# Altium PCB Copy of PCB1.PcbDoc
Units mm, origin at the board's own origin, x right, y up, seen from the top; angles counter-clockwise.
Board outline 56.87 x 26.01 mm, 2 copper layers (Top Layer, Bottom Layer); 39 components, 32 nets, 129 pads, 0 vias.
Unrouted connection lines stored in the file: 76.
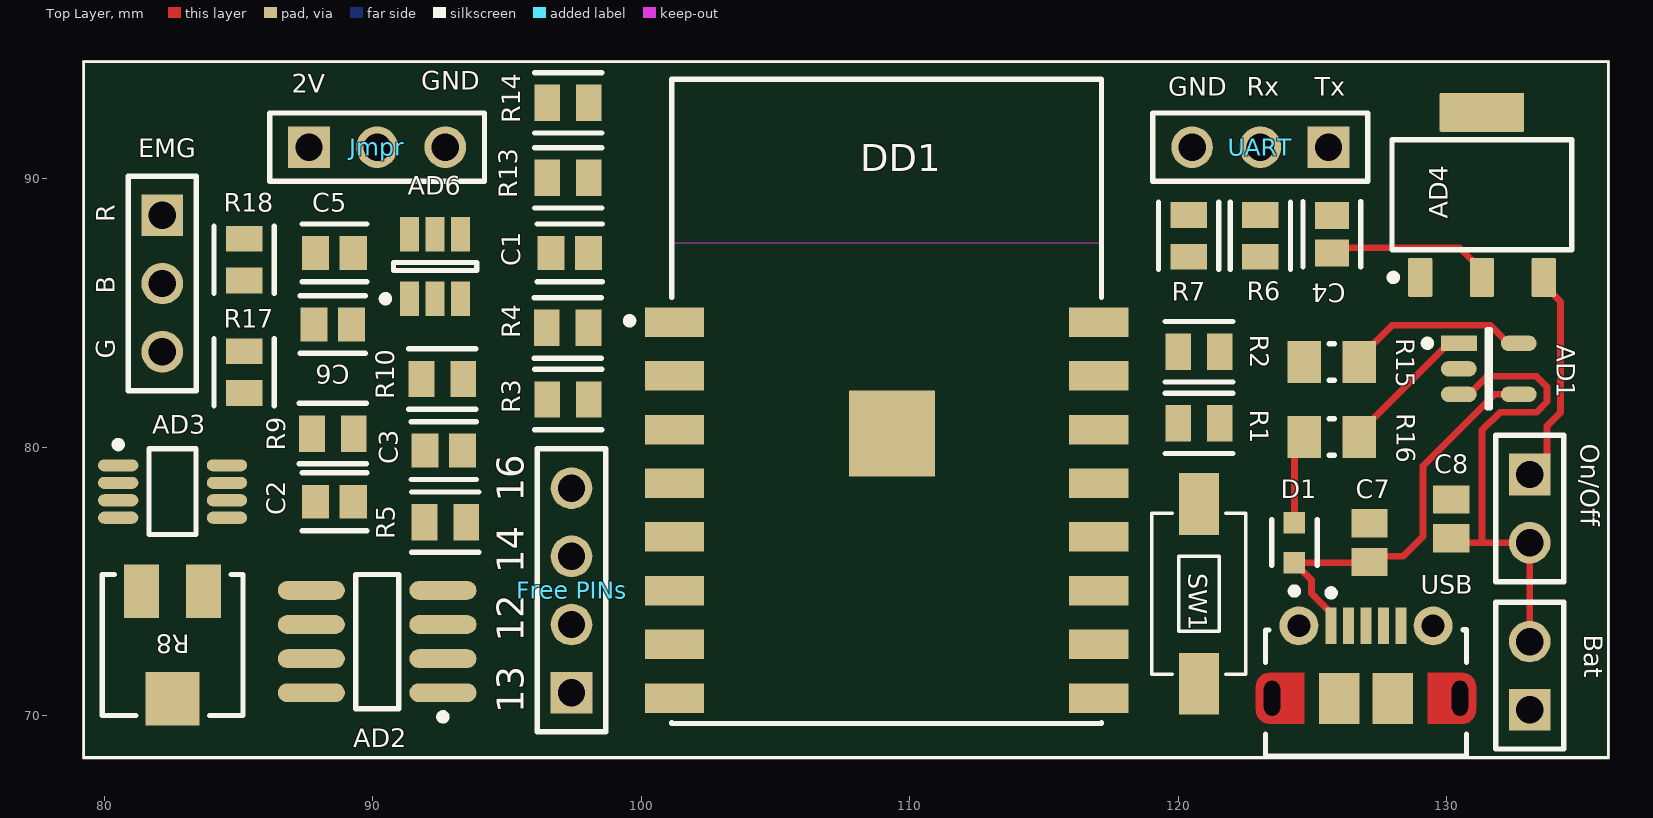
[diagram p0: Top Layer view]
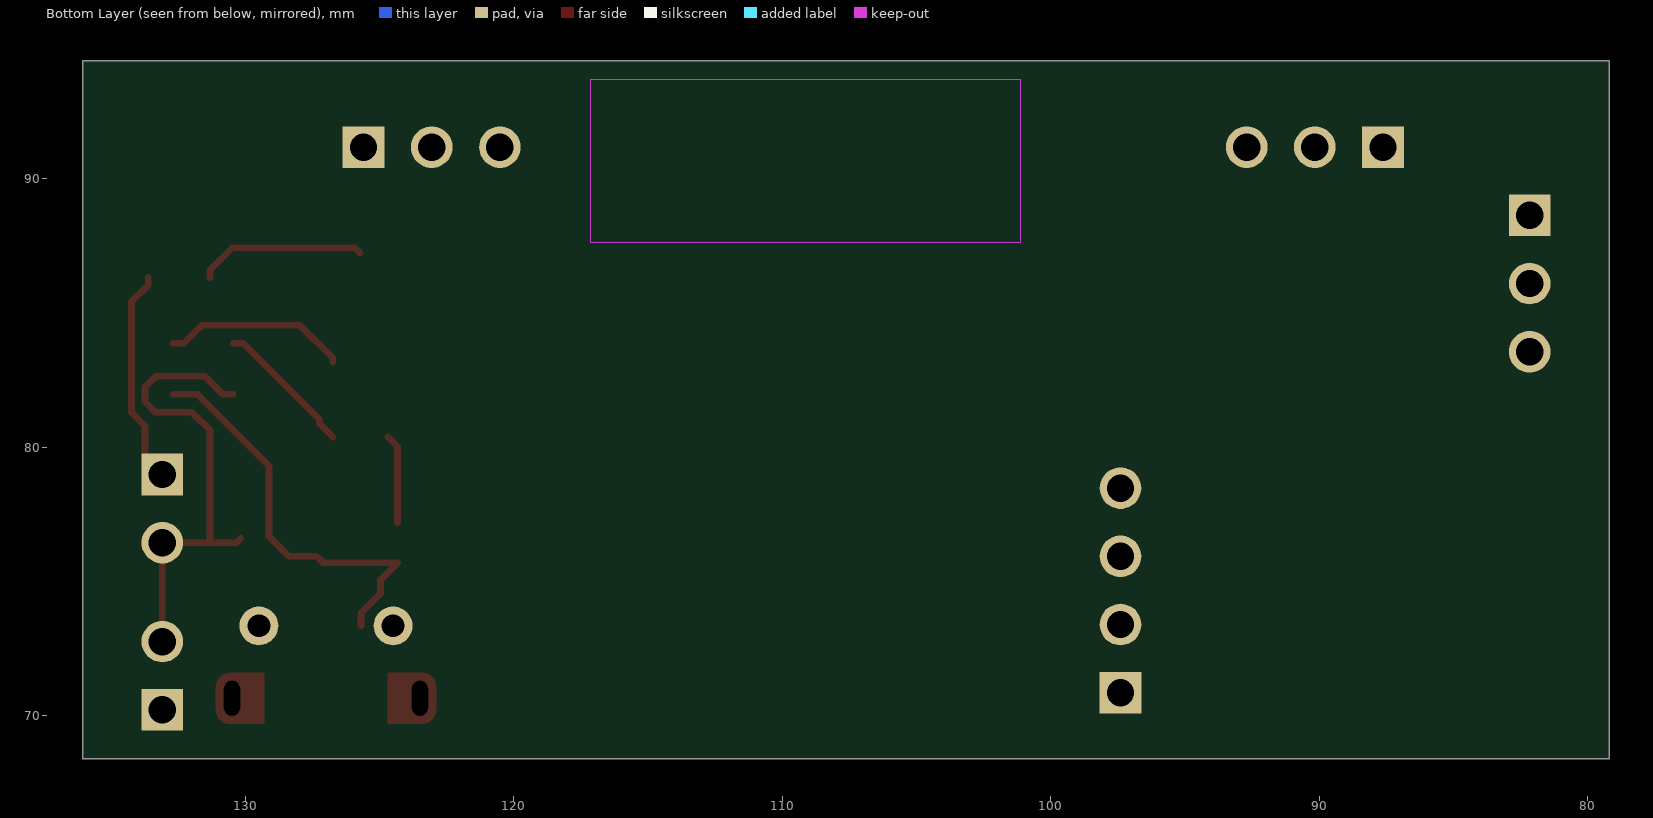
[diagram p1: Bottom Layer view, seen from below]

## Layer stack, top to bottom
Top Solder: solder mask 0.0102, Solder Resist, Dk 3.5
Top Layer: signal copper 0.0356
Dielectric 1: dielectric 0.32, FR-4, Dk 4.8
Bottom Layer: signal copper 0.0356
Bottom Solder: solder mask 0.0102, Solder Resist, Dk 3.5

## Board outline
79.198,68.453 ccw(c79.248,68.453) 79.248,68.403 136.017,68.403 ccw(c136.017,68.453) 136.067,68.453 136.067,94.361 ccw(c136.017,94.361) 136.017,94.411 79.249,94.411 ccw(c79.248,94.361) 79.198,94.361

## Design rules (kind name [scope] priority, off if disabled: settings)
Clearance [All] p1: gap=0.254 ignorepadtopadclearanceinfootprint=FALSE except(0: Arc-Hole Track-Hole SMDPad-Hole THPad-Hole Via-Hole Fill-Hole Poly-Hole Region-Hole Text-Hole)
PolygonConnect [All] p1: connectstyle=Relief reliefconductorwidth=0.254 reliefentries=4 polygonreliefangle="90 Angle" airgapwidth=0.254
RoutingVias [All] p1: holewidth=0.711 width=1.27 viastyle="Through Hole" minholewidth=0.711 minwidth=1.27 maxholewidth=0.711 maxwidth=1.27
SolderMaskExpansion [All] p1: expansion=0.102
Width [All] p1: maxlimit=0.254 minlimit=0.254 preferedwidth=0.254
30 further rules are at their usual default settings.

## Components (designator, comment, footprint, x,y, rotation, side; value= is the part's Value field where it differs from the comment)
AD1 "MCP73831" FP-C04-091-OT-IPC_B 131.572,82.931 r0 top
AD2 "MCP6002" SOIC-SN8_M 90.17,72.771 r180 top
AD3 "AD8226A" ADI-RM-8_L 82.55,78.359 r0 top
AD4 "LM1117" DCY0004A_L 131.318,89.408 r90 top
AD6 "MCP3421" SOT-23-CH6_M 92.329,86.741 r90 top
Bat "TSW-102-26-G-S" SMTC-TSW-102-26-XX-S 133.096,70.231 r90 top
C1 "0.1uf" FP-0805-L_2_0_0_1-W_1_25-IPC_C 97.342,87.249 r0 top
C2 "10uF" FP-0805-L_2_0_0_1-W_1_25-IPC_C 88.579,77.978 r180 top
C3 "10uF" FP-0805-L_2_0_0_1-W_1_25-IPC_C 92.65,79.883 r0 top
C4 "0.1uf" FP-0805-L_2_0_0_1-W_1_25-IPC_C 125.73,87.944 r90 top
C5 "0.1uF" FP-0805-L_2_0_0_1-W_1_25-IPC_C 88.579,87.249 r180 top
C6 "10uF" FP-0805-L_2_0_0_1-W_1_25-IPC_C 88.519,84.582 r180 top
C7 "4.7uF" CAPC2013X145X50LL20T20 127.127,76.454 r270 top
C8 "4.7uF" CAPC2013X145X50LL20T20 130.175,77.343 r270 top
D1 "LTST-C190GKT" FP-LTST-C190GKT-MFG 124.333,76.454 r90 top
DD1 "ESP-12S" FP-ESP-12S-MFG 109.147,81.718 r0 top
EMG "TSW-103-07-T-S" SMTC-TSW-103-07-X-S 82.169,88.646 r270 top
"Free PINs" "TSW-104-08-L-S" SMTC-TSW-104-08-X-S 97.409,70.866 r90 top
Jmpr "TSW-103-07-T-S" SMTC-TSW-103-07-X-S 87.63,91.186 r0 top
On/Off "TSW-102-26-G-S" SMTC-TSW-102-26-XX-S 133.096,78.994 r270 top
R1 "10K" FP-RG2012-IPC_C 120.777,80.899 r180 top
R2 "10K" FP-RG2012-IPC_C 120.777,83.566 r0 top
R3 "10K" FP-RG2012-IPC_C 97.282,81.788 r180 top
R4 "10K" FP-RG2012-IPC_C 97.268,84.455 r180 top
R5 "10K" FP-RG2012-IPC_C 92.71,77.216 r180 top
R6 "1K" FP-RG2012-IPC_C 123.063,87.884 r270 top
R7 "2K" FP-RG2012-IPC_C 120.396,87.884 r270 top
R8 "10K" FP-TS53YJ-MFG 82.55,72.644 r180 top
R9 "1K" FP-RG2012-IPC_C 88.519,80.518 r0 top
R10 "1K" FP-RG2012-IPC_C 92.597,82.55 r180 top
R13 "2K" FP-RG2012-IPC_C 97.282,90.043 r180 top
R14 "2K" FP-RG2012-IPC_C 97.282,92.837 r180 top
R15 "2K" RESC2013X60X30ML20T20 125.721,83.185 r0 top
R16 "470" RESC2013X60X30ML20T20 125.721,80.391 r0 top
R17 "3K" FP-RG2012-IPC_C 85.217,82.804 r270 top
R18 "1K" FP-RG2012-IPC_C 85.217,86.995 r90 top
SW1 "Bootloader mode" 434111050826 120.777,74.549 r90 top
UART "TSW-103-07-T-S" SMTC-TSW-103-07-X-S 125.603,91.186 r180 top
USB "Micro USB" USB-MICRO-B_V 127,72.009 r0 top (schematic designator J1)

## Footprints (in the part's own frame and the unit in brackets; to place one, negate y for a bottom-side part, rotate by r counter-clockwise, add the part's x,y. Pads: shape width x height; smd on the part's side, far side on the other; paste and mask are expansions set on the pad)
434111050826 [mm] "6.0*3.5mm vertical type, SMD, height 5.0mm, white actuator, 260gf, T&R"
  rect 2.3x1.5 smd: 1(-3.35,0) 2(3.35,0)
  silkscreen extent -3,-1.75 3,1.75, body extent -4,-1.75 4,1.75, height 5
ADI-RM-8_L [mm] "SOP, 8-Leads, Body 3x3mm, Pitch 0.65mm, IPC High Density"
  oval 1.5x0.45 smd: 1(-2.025,0.975) 2(-2.025,0.325) 3(-2.025,-0.325) 4(-2.025,-0.975) 5(2.025,-0.975) 6(2.025,-0.325) 7(2.025,0.325) 8(2.025,0.975)
  silkscreen extent -2.15,-1.6 0.87,1.87, body extent -1.6,-1.6 1.6,1.6, height 1.1
CAPC2013X145X50LL20T20 [mm] "Chip Capacitor, 2-Leads, Body 2.00x1.25mm, IPC High Density"
  rect 1.05x1.35 smd: 1(-0.725,0) 2(0.725,0)
  body extent -1.1,-0.72 1.1,0.72, height 1.45
DCY0004A_L [mm] "SOT223, 4-Leads, Body 6.7x3.7mm, Pitch 2.3mm, IPC High Density"
  rrect11% 1.45x0.9 smd: 1(-3.075,2.3) 2(-3.075,0) 3(-3.075,-2.3)
  rrect7% 1.45x3.15 smd: 4(3.075,0)
  silkscreen extent -3.2,-3.35 2.05,3.42, body extent -3.5,-3.25 3.5,3.25, height 1.62
FP-0805-L_2_0_0_1-W_1_25-IPC_C [mm]
  rect 1.008x1.262 smd paste+0 mask+0: 1(-0.702,0) 2(0.702,0)
  silkscreen extent -1.21,-1.07 1.21,1.07, body extent -1.31,-0.77 1.31,0.77, height 0.25
FP-C04-091-OT-IPC_B [mm]
  rect 1.338x0.578 smd paste+0 mask+0: 1(-1.116,0.95)
  rrect100% 1.338x0.578 smd paste+0 mask+0: 2(-1.116,0) 3(-1.116,-0.95) 4(1.116,-0.95) 5(1.116,0.95)
  silkscreen extent -2.41,-1.45 0.05,1.45
FP-ESP-12S-MFG [mm]
  rect 2.2x1.1 smd paste+0 mask+0: 1(-7.9,2.95) 2(-7.9,0.95) 3(-7.9,-1.05) 4(-7.9,-3.05) 5(-7.9,-5.05) 6(-7.9,-7.05) 7(-7.9,-9.05) 8(-7.9,-11.05) 9(7.9,-11.05) 10(7.9,-9.05) 11(7.9,-7.05) 12(7.9,-5.05) 13(7.9,-3.05) 14(7.9,-1.05) 15(7.9,0.95) 16(7.9,2.95)
  rect 3.2x3.2 smd paste+0 mask+0: 17(0.2,-1.2)
  Keep-Out Layer region: -8,5.9 8,5.9 8,12 -8,12
  Keep-Out Layer region: -8,5.9 8,5.9 8,12 -8,12
  silkscreen extent -9.7,-12 8,12, body extent -9.1,-12.1 9.1,12.1, height 0.25
FP-LTST-C190GKT-MFG [mm]
  rect 0.8x0.8 smd paste+0 mask+0: 1(-0.75,0) 2(0.75,0)
  silkscreen extent -1.92,-0.85 0.85,0.85, body extent -1.25,-0.55 1.25,0.55, height 0.25
FP-RG2012-IPC_C [mm]
  rect 0.955x1.356 smd paste+0 mask+0: 1(-0.776,0) 2(0.776,0)
  silkscreen extent -1.25,-1.12 1.25,1.12, body extent -1.35,-0.82 1.35,0.82, height 0.25
FP-TS53YJ-MFG [mm]
  rect 1.3x2 smd paste+0 mask+0: 1(1.15,-2) 3(-1.15,-2)
  rect 2x2 smd paste+0 mask+0: 2(0,2)
  silkscreen extent -2.63,-2.63 2.63,2.63, body extent -2.73,-3.1 2.73,3.1, height 0.25
RESC2013X60X30ML20T20 [mm] "Chip Resistor, 2-Leads, Body 2.00x1.25mm, IPC Low Density"
  rect 1.25x1.55 smd: 1(-1.025,0) 2(1.025,0)
  silkscreen extent -0.1,-0.67 0.1,0.67, body extent -1.1,-0.72 1.1,0.72, height 0.6
SMTC-TSW-102-26-XX-S [mm] ".025 SQ Post Terminal Strip Assembly, 1x2 Pins, Vertical, 2.54mm Pitch, Male"
  rect 1.55x1.55 hole 1.02: 1(0,0)
  round 1.55 hole 1.02: 2(2.54,0)
  silkscreen extent -1.46,-1.27 4,1.27, body extent -1.4,-1.27 3.81,1.27, height 8.38
SMTC-TSW-103-07-X-S [mm] ".025 SQ Post Terminal Strip Assembly, 1x3 Pins, Vertical, 2.54mm Pitch, Male"
  rect 1.55x1.55 hole 1.02: 1(0,0)
  round 1.55 hole 1.02: 2(2.54,0) 3(5.08,0)
  silkscreen extent -1.46,-1.27 6.54,1.27, body extent -1.27,-1.27 6.35,1.27, height 8.38
SMTC-TSW-104-08-X-S [mm] ".025 SQ Post Terminal Strip Assembly, 1x4 Pins, Vertical, 2.54mm Pitch, Male"
  rect 1.55x1.55 hole 1.02: 1(0,0)
  round 1.55 hole 1.02: 2(2.54,0) 3(5.08,0) 4(7.62,0)
  silkscreen extent -1.46,-1.27 9.08,1.27, body extent -1.27,-1.27 8.89,1.27, height 8.38
SOIC-SN8_M [mm] "SOIC, 8-Leads, Body 4.9x3.9mm, Pitch 1.27mm, IPC Low Density"
  oval 2.5x0.7 smd: 1(-2.45,1.905) 2(-2.45,0.635) 3(-2.45,-0.635) 4(-2.45,-1.905) 5(2.45,-1.905) 6(2.45,-0.635) 7(2.45,0.635) 8(2.45,1.905)
  silkscreen extent -2.58,-2.5 0.8,2.93, body extent -2,-2.5 2,2.5, height 1.75
SOT-23-CH6_M [mm] "SOT23, 6-Leads, Body 2.9x1.7mm, Pitch 0.95mm, Lead Span 2.8mm, IPC Low Density"
  rect 1.3x0.7 smd: 1(-1.2,0.95) 2(-1.2,0) 3(-1.2,-0.95) 4(1.2,-0.95) 5(1.2,0) 6(1.2,0.95)
  silkscreen extent -1.32,-1.55 0.15,1.97, body extent -0.9,-1.55 0.9,1.55, height 1.45
USB-MICRO-B_V [mm] "USB, MICRO B, Body 7.491x4.695 mm, Pitch 0.65 mm"
  rect 0.4x1.35 smd: 1(-1.3,1.35) 2(-0.65,1.35) 3(0,1.35) 4(0.65,1.35) 5(1.3,1.35)
  round 1.45 hole 0.85: 6(-2.5,1.35) 7(2.5,1.35)
  rrect50% 0x0 hole 0.6 slot 1.3 at 90 deg: 8(-3.5,-1.35) 11(3.5,-1.35)
  rect 1.5x1.9 smd: 9(-1,-1.35) 10(1,-1.35)
  Top Layer circle w0.5: c-3.6,-1.8 r0.25
  Top Layer circle w0.5: c-3.6,-0.9 r0.25
  Top Layer circle w0.5: c3.6,-1.8 r0.25
  Top Layer circle w0.5: c3.6,-0.9 r0.25
  Top Layer region: -3.6,-1.8 -3.6,-0.9 -4.1,-0.9 -4.1,-1.8
  Top Layer region: 3.6,-0.9 3.6,-1.8 4.1,-1.8 4.1,-0.9
  Top Layer region: 2.3,-0.4 2.3,-2.3 3.6,-2.3 3.6,-0.4
  Top Layer region: -2.3,-2.3 -2.3,-0.4 -3.6,-0.4 -3.6,-2.3
  silkscreen extent -3.75,-3.5 3.75,2.7, body extent -4.1,-3.9 4.1,1.5, height 2.67

## Part data
AD1: library part CMP-0133-00143-2, "IC CONTROLLR LI-ION 4.2V SOT23-5", Case/Package=SOT-23, Drain to Source Resistance=350mR, Max Charge Current=500mA, Max Input Voltage=6V, Max Operating Temperature=85°C, Max Output Voltage=4.5V, Max Power Dissipation=1.54W, Min Operating Temperature=-40°C, Min Output Voltage=4.168V, Min Supply Voltage=3.75V, Output Voltage=4.2V, Voltage Rating=4.534V, Contact Plating=Tin, Height=0.051inch, Lead Free="Lead Free", Length=0.122inch, Max Supply Voltage=6V, Mount="Surface Mount", Number of Cells=1, Number of Channels=1, Number of Outputs=1, Number of Pins=5, Output Current=500mA, Packaging="Tape and Reel", Radiation Hardening=No, REACH SVHC="No SVHC", Termination=SMD/SMT, Weight=0.00709oz, Width=0.071inch
AD2: library part CMP-0187-00365-3, "None", Case/Package=SOIC, Input Bias Current=1pA, Input Offset Voltage (Vos)=4.5mV, Max Operating Temperature=85°C, Max Supply Voltage=6V, Min Operating Temperature=-40°C, Min Supply Voltage=1.8V, Nominal Supply Current=100uA, Operating Supply Voltage=5.5V, Output Current=23mA, Package Quantity=100, Power Supply Rejection Ratio (PSRR)=86dB, Voltage Gain=112dB, Amplifier Type="GENERAL PURPOSE", Bandwidth=1MHz, Common Mode Rejection Ratio=60dB, Gain Bandwidth Product=1MHz, Height=1.25mm, Input Offset Voltage-Max=4.5mV, Lead Free="Lead Free", Length=4.9mm, Mount="Surface Mount", Number of Amplifiers=2, Number of Channels=2, Number of Circuits=2, Number of Elements=2, Number of Pins=8, Packaging=Rail/Tube, Radiation Hardening=No, REACH SVHC="No SVHC", RoHS Compliant=Yes, Slew Rate=0.6V/µs, Slew Rate-Nom=0.6V/µs, Supply Current=100uA, Technology=CMOS, Unity Gain Bandwidth Product=1MHz, Width=3.9mm
AD3: library part CMP-2000-05748-1, "Wide Supply Range, Rail-to-Rail Output Instrumentation Amplifier, 2.2 to 36 V, -40 to 125 degC, 8-Pin MSOP (RM-8), RoHS, Tube", Current - Input Bias=20nA, Current - Output / Channel=13mA, Current - Supply=350µA, Manufacturer="Analog Devices", Operating Temperature=-40°C~125°C, Package / Case="8-TSSOP,8-MSOP(0.118\",3.00mmWidth)", Package Description="8-Pin Mini Small Outline Package, Body 3 x 3 mm, Pitch 0.65 mm", Package Reference=RM-8, Package Version=10/2009, Standard Package=50, Supplier Device Package=8-MSOP, Voltage - Input Offset=100µV, Voltage - Supply, Single/Dual (±)=2.2V~36V,±1.35V~18V, -3db Bandwidth=1.5MHz, Amplifier Type=Instrumentation, Category=IntegratedCircuits(ICs), Datasheet URL=http://www.analog.com/media/en/technical-documentation/data-sheets/AD8226.pdf, Datasheet Version="Rev. C, 09/2012", Design Resources=PLCandDCSUniversalAnalogInputUsingEither4or6-PinTerminalBlock, EDA / CAD Models=DownloadfromAcceleratedDesigns, Family=Linear-Amplifiers-Instrumentation,OPAmps,BufferAmps, Gain Bandwidth Product=-, Manufacturer URL=http://www.analog.com/, Mfg Application Notes=AutomaticExternalDefibrillator(AED)SolutionsElectromagneticFlowMeterSolutionsMotorControlSolution—ServoControlProgrammableLogicControllers(PLCs)SolutionsElectrocardiogram(ECG)Solutions, Mounting Technology=SurfaceMount, Mounting Type=SurfaceMount, Number of Circuits=1, Online Catalog=Instrumentation, Output Type=Rail-to-Rail, Package URL=http://www.analog.com/static/imported-files/packages/PKG_PDF/MSOP%28RM%29/RM_8.pdf, Packaging=Tube, PCN Design/Specification=PolyimideAlignmentTarget11/Aug/2015, Product Training Modules=CommonPhotodiodeOp-AmpCircuitProblemsandSolutionsIndirectCurrentFeedbackInstrumentationAmplifierApplicationsGuide, Series=-, Slew Rate=0.6V/µs
AD4: library part CMP-0062-01639-4, "800mA Low-Dropout Linear Regulator, 4-pin SOT-223, Pb-Free LM1117", Manufacturer="Texas Instruments", PackageTopMarking=XYTT*N05A, PartNumber=LM1117MPX-3.3/NOPB, PowerWise=N, Code_IPC=SOT223-4, Code_JEDEC=TO-261-AA, ComponentLink1Description="Datasheet URL", ComponentLink1URL=http://www.ti.com/general/docs/lit/getliterature.tsp?genericPartNumber=LM1117-N&fileType=pdf, CompType="LDO IC", High-Reliability=Y, PackageDescription="Molded SOT-223, 6.50 x 3.56 x 1.6mm Body, 4 Lead, 2.3mm Pitch", PackageReference=DCY0004A, PinCount=4, RoHS=Y
AD6: library part CMP-0188-00739-2, "18-Bit Analog-to-Digital Converter with I2C Interface and On-Board Reference, 6-Pin SOT-23, Extended Temperature, Tape and Reel", Code_IPC=SOT26A-6, ComponentLink1Description="Manufacturer URL", ComponentLink1URL=http://www.microchip.com/, ComponentLink2Description=Datasheet, ComponentLink2URL=http://ww1.microchip.com/downloads/en/DeviceDoc/22003e.pdf, ComponentLink3Description="Package Specification", ComponentLink3URL=http://www.microchip.com/stellent/groups/techpub_sg/documents/packagingspec/en012702.pdf, DatasheetVersion="revE, Aug-2009", PackageDescription="6-Lead Plastic Small Outline Transistor (CH) [SOT-23]", PackageReference=SOT-23-CH6, PackageVersion="revBB, Aug-2009", RevisionNote="URLs added."
Bat On/Off: library part CMP-1024-00327-1, "0.025\" SQ Post Header, Through-hole, Vertical, -55 to 125 degC, 2.54 mm Pitch, 2-Pin, Male, RoHS", Manufacturer=Samtec, Temperature Range="-55 to 125 degC", ComponentLink1Description="Manufacturer URL", ComponentLink1URL=http://www.samtec.com, ComponentLink2Description=Datasheet, ComponentLink2URL=http://www.samtec.com/documents/webfiles/pdf/TSW_TH.PDF, ComponentLink3Description="Package Specification", ComponentLink3URL=http://www.samtec.com/documents/webfiles/cpdf/TSW-XXX-XX-XXX-X-XX-XXX-MKT.pdf, DatasheetVersion=F-214, Mounting Technology=Through-hole, Orientation=Vertical, PackageDescription=".025[0.64] SQ. Post Terminal Strip Assembly", PackageReference=TSW-102-26-XX-S, PackageVersion="DM, 8/1988", PartNumber=TSW-102-26-G-S, Pitch="2.54 mm", RoHS=True
C1 C3 C4 C5: library part CMP-14477-004636-2, "0.1uF 0805", Capacitance=100nF, Case/Package=0805, Case Code (Metric)=2012, Max Operating Temperature=125°C, Min Operating Temperature=-55°C, Package Quantity=3000, Resistor Type=Ceramic, Tolerance=10%, Voltage=10V, Case Code (Imperial)=0805, Construction=Flat, Depth=1.25mm, Halogen Free="Halogen Free", Height=1.25mm, Lead Free="Lead Free", Length=2mm, Mount="Surface Mount", Number of Pins=2, Packaging="Tape and Reel", Radiation Hardening=No, RoHS Compliant=Yes, Series=CFCAP™, Termination=SMD/SMT, Thickness=0.053inch, Voltage Rating=10V, Voltage Rating (DC)=10V, Weight=0.000194oz, Width=1.25mm
C2 C6: library part CMP-14477-004636-2, "10uF 0805", Capacitance=100nF, Case/Package=0805, Case Code (Metric)=2012, Max Operating Temperature=125°C, Min Operating Temperature=-55°C, Package Quantity=3000, Resistor Type=Ceramic, Tolerance=10%, Voltage=10V, Case Code (Imperial)=0805, Construction=Flat, Depth=1.25mm, Halogen Free="Halogen Free", Height=1.25mm, Lead Free="Lead Free", Length=2mm, Mount="Surface Mount", Number of Pins=2, Packaging="Tape and Reel", Radiation Hardening=No, RoHS Compliant=Yes, Series=CFCAP™, Termination=SMD/SMT, Thickness=0.053inch, Voltage Rating=10V, Voltage Rating (DC)=10V, Weight=0.000194oz, Width=1.25mm
C7 C8: library part CMP-2007-01344-1, "4.7uF 0805", Manufacturer=Vitramon, Part Number=VJ0805A472FXJTW1BC
D1: library part CMP-22017-000005-2, "LED GREEN CLEAR CHIP SMD", Case/Package=0603, Case Code (Metric)=1608, Color=Green, Forward Current=30mA, Forward Voltage=2.1V, Lens Color=Colorless, Max Operating Temperature=85°C, Min Operating Temperature=-55°C, Package Quantity=1, Power Dissipation=100mW, Reverse Voltage=5V, Test Current=10mA, Voltage=2V, Case Code (Imperial)=0603, Depth=0.8mm, Dominant Wavelength=569nm, Height=0.8mm, Illumination Color=Green, Lead Free="Lead Free", Length=1.6mm, Lens Style=Clear, Lens Transparency=Clear, Luminous Intensity=6mcd, Mount="Surface Mount", Number of Elements=1, Number of LEDs=1, Number of Pins=2, Packaging="Tape and Reel", Power Rating=100mW, Radiation Hardening=No, Viewing Angle=130°, Wavelength=565nm, Width=0.8mm
DD1: library part CMP-204316-000002-1, "RX TXRX MOD WIFI PCB TRACE SMD", Frequency=2.484GHz, Data Rate=54Mbps, Interface=I2C, Sensitivity=-90dBm, Series=-
EMG Jmpr UART: library part CMP-1024-00332-1, "0.025\" SQ Post Header, Through-hole, Vertical, -55 to 105 degC, 2.54 mm Pitch, 3-Pin, Male, RoHS", Manufacturer=Samtec, Temperature Range="-55 to 105 degC", ComponentLink1Description="Manufacturer URL", ComponentLink1URL=http://www.samtec.com, ComponentLink2Description=Datasheet, ComponentLink2URL=http://www.samtec.com/documents/webfiles/pdf/TSW_TH.PDF, ComponentLink3Description="Package Specification", ComponentLink3URL=http://www.samtec.com/documents/webfiles/cpdf/TSW-XXX-XX-XXX-X-XX-XXX-MKT.pdf, DatasheetVersion=F-214, Mounting Technology=Through-hole, Orientation=Vertical, PackageDescription=".025[0.64] SQ. Post Terminal Strip Assembly", PackageReference=TSW-103-07-X-S, PackageVersion="DM, 8/1988", PartNumber=TSW-103-07-T-S, Pitch="2.54 mm", RoHS=True
"Free PINs": library part CMP-1024-00358-1, "0.025\" SQ Post Header, Through-hole, Vertical, -55 to 125 degC, 2.54 mm Pitch, 4-Pin, Male, RoHS", Manufacturer=Samtec, Temperature Range="-55 to 125 degC", ComponentLink1Description="Manufacturer URL", ComponentLink1URL=http://www.samtec.com, ComponentLink2Description=Datasheet, ComponentLink2URL=http://www.samtec.com/documents/webfiles/pdf/TSW_TH.PDF, ComponentLink3Description="Package Specification", ComponentLink3URL=http://www.samtec.com/documents/webfiles/cpdf/TSW-XXX-XX-XXX-X-XX-XXX-MKT.pdf, DatasheetVersion=F-214, Mounting Technology=Through-hole, Orientation=Vertical, PackageDescription=".025[0.64] SQ. Post Terminal Strip Assembly", PackageReference=TSW-104-08-X-S, PackageVersion="DM, 8/1988", PartNumber=TSW-104-08-L-S, Pitch="2.54 mm", RoHS=True
R1 R2 R3 R4 R5: library part CMP-2001-04803-2, "0805, 10kO", Case/Package=0805, Case Code (Metric)=2012, Max Operating Temperature=155°C, Max Power Dissipation=125mW, Min Operating Temperature=-55°C, Package Quantity=5000, Resistance=10kR, Resistor Type="Thin Film", Temperature Coefficient=10ppm/°C, Tolerance=0.05%, Voltage Rating=150V, Case Code (Imperial)=0805, Features="Automotive AEC-Q200", Height=0.02inch, Lead Free="Lead Free", Length=0.079inch, Number of Terminations=2, Packaging="Tape and Reel", Power Rating=125mW, RoHS Compliant=Yes, Series=RG, Size Code=0805, Termination=SMD/SMT, Voltage Rating (DC)=150V, Weight=0.000194oz, Width=1.2mm
R6 R9 R10 R17 R18: library part CMP-2001-04803-2, "0805, 1kO", Case/Package=0805, Case Code (Metric)=2012, Max Operating Temperature=155°C, Max Power Dissipation=125mW, Min Operating Temperature=-55°C, Package Quantity=5000, Resistance=10kR, Resistor Type="Thin Film", Temperature Coefficient=10ppm/°C, Tolerance=0.05%, Voltage Rating=150V, Case Code (Imperial)=0805, Features="Automotive AEC-Q200", Height=0.02inch, Lead Free="Lead Free", Length=0.079inch, Number of Terminations=2, Packaging="Tape and Reel", Power Rating=125mW, RoHS Compliant=Yes, Series=RG, Size Code=0805, Termination=SMD/SMT, Voltage Rating (DC)=150V, Weight=0.000194oz, Width=1.2mm
R7 R13 R14: library part CMP-2001-04803-2, "0805, 2kO", Case/Package=0805, Case Code (Metric)=2012, Max Operating Temperature=155°C, Max Power Dissipation=125mW, Min Operating Temperature=-55°C, Package Quantity=5000, Resistance=10kR, Resistor Type="Thin Film", Temperature Coefficient=10ppm/°C, Tolerance=0.05%, Voltage Rating=150V, Case Code (Imperial)=0805, Features="Automotive AEC-Q200", Height=0.02inch, Lead Free="Lead Free", Length=0.079inch, Number of Terminations=2, Packaging="Tape and Reel", Power Rating=125mW, RoHS Compliant=Yes, Series=RG, Size Code=0805, Termination=SMD/SMT, Voltage Rating (DC)=150V, Weight=0.000194oz, Width=1.2mm
R8: library part CMP-02410-000010-1, "0-10K", Max Operating Temperature=125°C, Max Power Dissipation=250mW, Min Operating Temperature=-55°C, Package Quantity=1, Resistance=100kR, Resistance Tolerance=20%, Resistor Type=Cermet, Temperature Coefficient=100ppm/°C, Depth=5.5mm, Height=0.106inch, Lead Free="Lead Free", Length=0.197inch, Military Standard=Not, Mount="Surface Mount", Number of Turns=1, Packaging="Tape and Reel", Power Rating=250mW, Radiation Hardening=No, RoHS Compliant=Yes, Series=TS53Y, Taper=Linear, Technology=CERMET, Termination=SMD/SMT, Tolerance=20%, Width=0.197inch
R15: library part CMP-2001-04656-1, "0805, 2KO", Manufacturer="KOA Speer", Part Number=RK73B2ATTD102J
R16: library part CMP-2001-04656-1, "0805, 470O", Manufacturer="KOA Speer", Part Number=RK73B2ATTD102J
SW1: library part CMP-1459-00003-1, "WS-TASV SMD Tact Switch 6.0X3.5 mm", Manufacturer="Wuerth Elektronik", PartNumber=434111050826, ComponentLink1Description="Manufacturer URL", ComponentLink1URL=http://www.we-online.com, ComponentLink2Description=Datasheet, ComponentLink2URL=http://katalog.we-online.de/em/datasheet/434111050826.pdf, NoPins=02, PackageReference=434111050826
USB: library part CMP-2000-05827-1, "Micro-USB B Receptacle, Right Angle, Bottom Mount, Surface Mount, with Solder Tabs, -30 to 85 degC, 5-Pin USB, RoHS, Tape and Reel", Manufacturer=Molex, Package Description="5-Leads USB, Micro B, Body 7.5 x 5 mm, Pitch 0.65 mm", Package Reference=MICRO-B, Package Version="Rev. F, 12/2012", Standard Package=1, Voltage - Max=30V, 3D Model=105017-0001.stp, Catalog Drawings=1050170001, Category=Connectors,Interconnects, Circuits=5, Connector Type=USB-microB, Datasheet URL=http://www.molex.com/elqNow/elqRedir.htm?ref=http://www.molex.com/webdocs/datasheets/pdf/en-us/1050170001_IO_CONNECTORS.pdf, Datasheet Version=03/2016, Family=USB,DVI,HDMIConnectors, Featured Product=Micro-USBConnectorsUSBConnectors, Features=Shielded,SolderRetention, Gender=Receptacle, Ingress Protection=-, Manufacturer URL=http://www.molex.com/, Mating Products=WM17145-ND-CABLEMICROUSBBTOSTDA1.0MWM17147-ND-CABLEMICROUSBBTOSTDA2.0MWM17146-ND-CABLEMICROUSBBTOSTDA1.5M, Mounting Technology=SurfaceMount, Mounting Type=BoardCutout,SurfaceMount,RightAngle, Number of Contacts=5, Online Catalog=Molex-MicroUSB, Other Names=WM1399DKR, Package URL=http://www.molex.com/pdm_docs/sd/1050170001_sd.pdf, Packaging=Digi-Reel®, PCN Assembly/Origin=ResinSupplier21/Oct/2015, RoHS Information=1050170001CertofCompliance, Series=-, Specifications=-

## Nets (pads, with @x,y where several pads share a name; then routed paths per layer and width w, separated by ;. In a path a pad name is that pad's centre, name@x,y a point inside that pad or via, vN(x,y) a via of type N, cw(c..) or ccw(c..) an arc to the next point about the centre after c; other vN are vias at no path point)
GND: AD1.2 AD2.4 AD3.5 AD4.1 AD4.4 AD6.2 Bat.1 C1.2 C3.2 C4.2 C5.2 C6.2 C7.1 C8.1 DD1.9 Jmpr.3 R5.2 R7.1 R10.1 R15.1 R18.2 SW1.1 UART.3 USB.5
NetAD1_1: AD1.1 R16.2 | length 5.2
  Top Layer w0.254: R16.2 127.244,80.889 127.244,81.049 130.076,83.881 AD1.1
NetAD1_3: AD1.3 Bat.2 C8.2 On/Off.2 | length 18
  Top Layer w0.254: C8.2 130.339,76.454 131.318,76.454 ; AD1.3 130.836,81.981 131.506,82.651 133.346,82.651 133.738,82.259 133.738,81.703 133.346,81.311 131.984,81.311 131.318,80.645 131.318,76.454 ; Bat.2 On/Off.2 131.318,76.454
NetAD1_4: AD1.4 C7.2 D1.1 USB.1 | length 15.4
  Top Layer w0.254: USB.1 125.7,73.834 124.965,74.569 124.965,75.072 D1.1 127.102,75.704 C7.2 127.344,75.946 128.375,75.946 129.119,76.69 129.119,79.317 131.783,81.981 AD1.4
NetAD1_5: AD1.5 R15.2 | length 6.9
  Top Layer w0.254: R15.2 126.746,83.335 127.962,84.551 131.638,84.551 132.308,83.881 AD1.5
NetAD2_1: AD2.1 AD2.2 AD3.6 EMG.3 Jmpr.1
NetAD2_3: AD2.3 C2.2 C3.1 R9.1 R10.2
NetAD2_5: AD2.5 R17.1 R18.1
NetAD2_6: AD2.6 AD2.7 DD1.2
NetAD2_8: AD2.8 AD3.8 AD4.3 C2.1 On/Off.1 R9.2 R17.2 | length 8.1
  Top Layer w0.254: On/Off.1 133.744,79.642 133.744,80.804 134.246,81.307 134.246,85.43 133.618,86.058 AD4.3
NetAD3_1: AD3.1 EMG.1
NetAD3_2: AD3.2 R8.3
NetAD3_3: AD3.3 R8.1 R8.2
NetAD3_4: AD3.4 EMG.2
NetAD3_7: AD3.7 AD6.1
NetAD4_2: AD4.2 AD6.5 C4.1 C5.1 C6.1 DD1.8 R1.1 R2.2 R3.2 R4.2 R13.2 R14.2 | length 6.3
  Top Layer w0.254: C4.1 125.927,87.439 130.487,87.439 131.318,86.608 AD4.2
NetAD6_3: AD6.3 DD1.14 R14.1
NetAD6_4: AD6.4 DD1.13 R13.1
NetAD6_6: AD6.6 Jmpr.2
NetC1_1: C1.1 DD1.1 R4.1
NetD1_2: D1.2 R16.1 | length 3.3
  Top Layer w0.254: D1.2 124.333,80.028 R16.1
NetDD1_3: DD1.3 R3.1
NetDD1_4: "Free PINs.4" DD1.4
NetDD1_5: "Free PINs.3" DD1.5
NetDD1_6: "Free PINs.2" DD1.6
NetDD1_7: "Free PINs.1" DD1.7
NetDD1_10: DD1.10 R5.1
NetDD1_11: DD1.11 R2.1
NetDD1_12: DD1.12 R1.2 SW1.2
NetDD1_15: DD1.15 R6.2 R7.2
NetDD1_16: DD1.16 UART.1
NetR6_1: R6.1 UART.2
pads on no net: DD1.17 USB.2 USB.3 USB.4 USB.6 USB.7 USB.8 USB.9 USB.10 USB.11

## Silkscreen, mask and mechanical layers (free items; w line width, h text height)
Top Overlay:
  lines w0.1: 79.248,68.453 79.248,94.361 136.017,94.361 136.017,68.453 79.248,68.453
  text "GND" at 91.821,93.331 h0.7
  text "2V" at 86.995,93.204 h0.7
  text "GND" at 119.634,93.091 h0.7
  text "Rx" at 122.555,93.091 h0.7
  text "Tx" at 125.095,93.091 h0.7
  text "R" at 80.391,88.392 h0.7 r90
  text "B" at 80.391,85.725 h0.7 r90
  text "G" at 80.391,83.312 h0.7 r90
  text "16" at 95.631,77.978 h1 r90
  text "14" at 95.631,75.311 h1 r90
  text "12" at 95.631,72.771 h1 r90
  text "13" at 95.631,70.104 h1 r90

## Text inside footprints (layer, text, board x,y; h text height)
USB: Mechanical 1 "PCB EDGE" at 119.8,69.109 h0.3